# EAGLE board BaseModule (EAGLE 8.2.2)
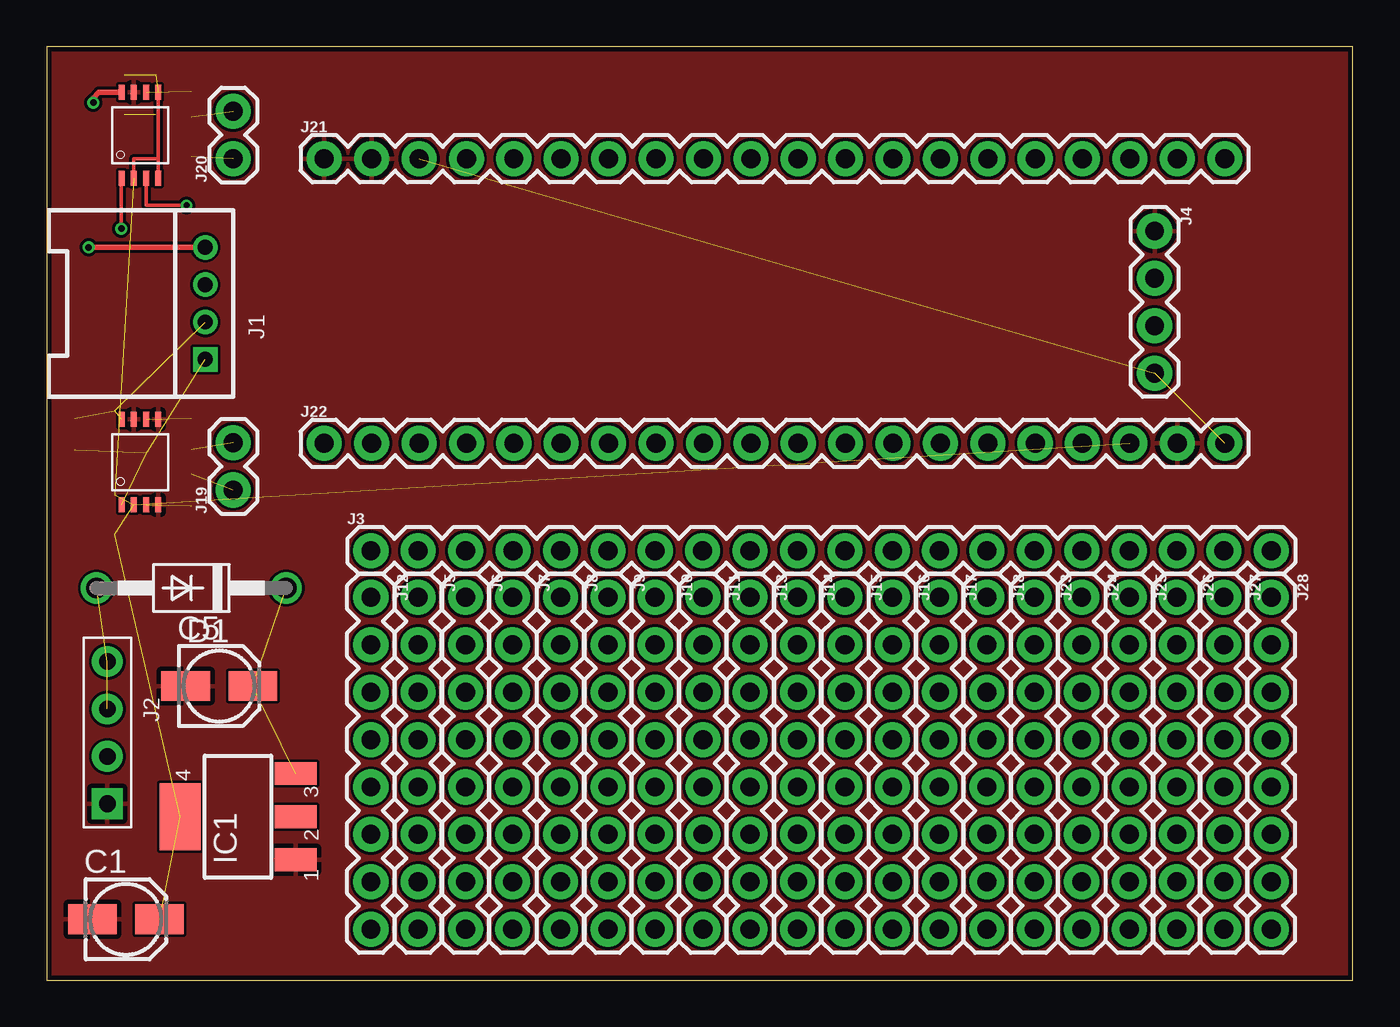
[diagram p0: board, top side]
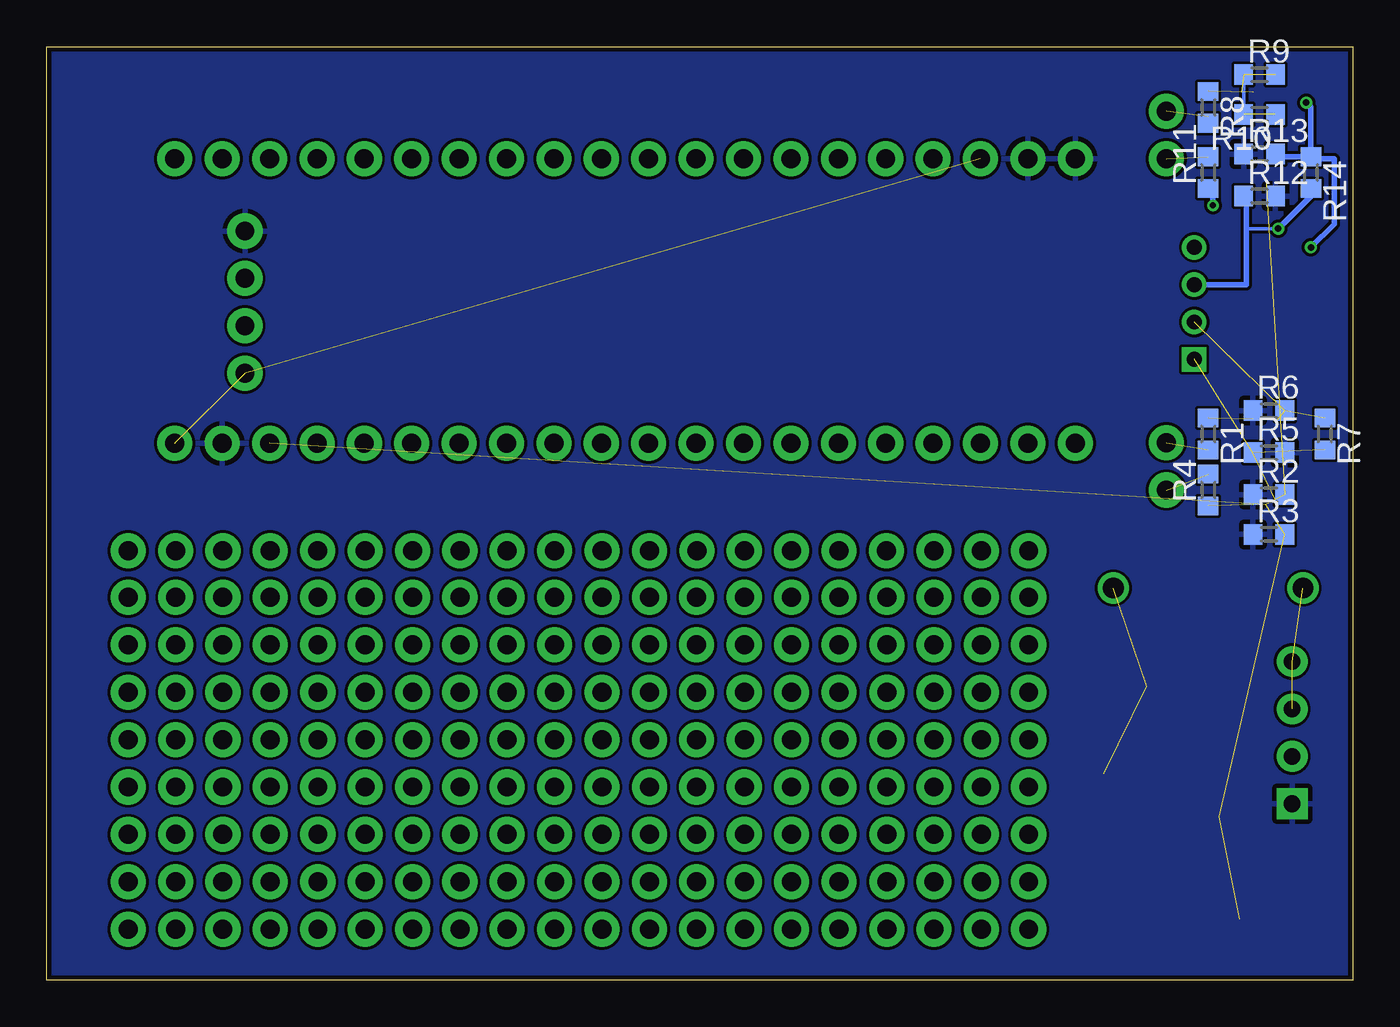
[diagram p1: board, bottom side, seen from below]

Size 70 x 50 mm. Coordinates in mm from the lower left corner, seen from the top.
Outline: 0,0 70,0 70,50 0,50 0,0
Copper layers (1*16): Top 0.035mm / dielectric 1.5mm / Bottom 0.035mm
Design rules "SeeedStudio_2layer_DRU_no_angle_20140221": minimum track width 6mil, minimum drill 12mil, track to track 6mil, track to pad 6mil, pad to pad 6mil, via to via 6mil, smd to smd 0mil, copper to edge 10mil, drill to drill 10mil, minimum pad ring 10mil, minimum via ring 6mil, stop-mask expansion 2mil, vias tented up to drill 100mil, thermal gap 10mil

## Footprints (pad centres in the part's own frame; a part is rotated, then mirrored left to right if it is on the bottom)
153CLV-0405 = smd 2.6 x 1.6: + 1.8,0; - -1.8,0
DO41-10 = drill 1.118: A 5.08,0; C -5.08,0
SOT223 = smd 1.219 x 2.235: 1 -2.311,-3.099; 2 0,-3.099; 3 2.311,-3.099 | smd 3.6 x 2.2: 4 0,3.099
HW4-2.0-90D = drill 0.8 pad 1.27 square: 1 -3,0 | drill 0.8 pad 1.27: 2 -1,0; 3 1,0; 4 3,0
H4-2.54 = drill 0.889 pad 1.651 square: 1 0,3.81 | drill 0.889 pad 1.651: 2 0,1.27; 3 0,-1.27; 4 0,-3.81
1X20 = drill 1.016 pad 1.88: 1 0,0; 2 2.54,0; 3 5.08,0; 4 7.62,0; 5 10.16,0; 6 12.7,0; 7 15.24,0; 8 17.78,0; 9 20.32,0; 10 22.86,0; 11 25.4,0; 12 27.94,0; 13 30.48,0; 14 33.02,0; 15 35.56,0; 16 38.1,0; 17 40.64,0; 18 43.18,0; 19 45.72,0; 20 48.26,0
1X04 = drill 1.016 pad 1.88: 1 0,0; 2 2.54,0; 3 5.08,0; 4 7.62,0
1X08 = drill 1.016 pad 1.88: 1 0,0; 2 2.54,0; 3 5.08,0; 4 7.62,0; 5 10.16,0; 6 12.7,0; 7 15.24,0; 8 17.78,0
1X02 = drill 1.016 pad 1.88: 1 0,0; 2 2.54,0
R0603 = smd 1 x 1.1: 1 -0.85,0; 2 0.85,0
MAX485 = smd 0.32 x 0.8: 1 -0.975,-2.3; 2 -0.325,-2.3; 3 0.325,-2.3; 4 0.975,-2.3; 5 0.975,2.3; 6 0.325,2.3; 7 -0.325,2.3; 8 -0.975,2.3

## Placement (x,y rotation side)
C1  20uF  [153CLV-0405]  4.25,3.25 0 top
C5  100uF  [153CLV-0405]  9.25,15.75 0 top
D1  1N4004  [DO41-10]  7.75,21 180 top
IC1  AMS1117-5.0  [SOT223]  10.25,8.75 90 top
J1  4P-2.0-90D  [HW4-2.0-90D]  8.5,36.25 90 top
J2  4p-2.54  [H4-2.54]  3.25,13.25 180 top
J3  [1X20]  17.38,23 0 top
J4  [1X04]  59.38,40.12 270 top
J5  [1X08]  19.91,20.5 270 top
J6  [1X08]  22.45,20.5 270 top
J7  [1X08]  24.98,20.5 270 top
J8  [1X08]  27.55,20.5 270 top
J9  [1X08]  30.07,20.5 270 top
J10  [1X08]  32.62,20.5 270 top
J11  [1X08]  35.16,20.5 270 top
J12  [1X08]  17.38,20.5 270 top
J13  [1X08]  37.7,20.5 270 top
J14  [1X08]  40.24,20.5 270 top
J15  [1X08]  42.77,20.5 270 top
J16  [1X08]  45.33,20.5 270 top
J17  [1X08]  47.85,20.5 270 top
J18  [1X08]  50.4,20.5 270 top
J19  [1X02]  10,26.25 90 top
J20  [1X02]  10,44 90 top
J21  [1X20]  14.88,44 0 top
J22  [1X20]  14.88,28.75 0 top
J23  [1X08]  52.94,20.5 270 top
J24  [1X08]  55.47,20.5 270 top
J25  [1X08]  58.02,20.5 270 top
J26  [1X08]  60.55,20.5 270 top
J27  [1X08]  63.08,20.5 270 top
J28  [1X08]  65.62,20.5 270 top
R1  10K  [R0603]  7.75,29.25 270 bottom
R2  10K  [R0603]  4.5,26 0 bottom
R3  10K  [R0603]  4.5,23.88 0 bottom
R4  10K  [R0603]  7.75,26.25 90 bottom
R5  20K  [R0603]  4.5,28.25 0 bottom
R6  20K  [R0603]  4.5,30.5 0 bottom
R7  120R  [R0603]  1.5,29.25 270 bottom
R8  10K  [R0603]  7.75,46.75 270 bottom
R9  10K  [R0603]  5,48.5 0 bottom
R10  10K  [R0603]  5,46.38 180 bottom
R11  10K  [R0603]  7.75,43.25 90 bottom
R12  20K  [R0603]  5,42 0 bottom
R13  20K  [R0603]  5,44.25 0 bottom
R14  120R  [R0603]  2.25,43.25 270 bottom
U$1  MAX485  [MAX485]  5,27.75 0 top
U$2  MAX485  [MAX485]  5,45.25 0 top

## Library data of the parts
C1 C5 R1-R14 = rcl
D1 = diode
IC1 = linear
J1 = Seeed-Connector
J2 = Seeed-Connector; MPN: P125-1104A0BS116A1
J3 J19-J22 = SparkFun-Connectors
J4 = SparkFun-Connectors; PROD_ID: CONN-09696
J5-J18 J23-J28 = SparkFun-Connectors; PROD_ID: CONN-08438
U$1 U$2 = Vaello

## Nets
+3V3: J4.4 J21.3 J22.20
+5V: C1.+ IC1.4 J22.18 R2.2 R3.2 R9.1 R9.2 R10.1 R10.2 U$1.2 U$2.2 U$2.4 U$2.5
+12V: D1.A J2.3 J2.4
A_IN: J1.2 R6.2 R7.1 U$1.8
A_OUT: J1.1 R5.1 R7.2 U$1.1
B_IN: J1.4 R13.2 R14.1 U$2.8
B_OUT: J1.3 R12.1 R14.2 U$2.1
GND: C1.- C5.- IC1.1 J2.1 J4.1 J21.1 J21.2 J22.19 R2.1 R3.1 R5.2 R6.1 R12.2 R13.1 U$1.4 U$1.5 U$1.7 U$2.7
N$1: R4.1 U$1.3
N$2: R11.1 U$2.3
N$3: R8.1 U$2.6
N$4: R1.1 U$1.6
N$9: C5.+ D1.C IC1.3
N$10: J21.9
N$11: J21.10
N$12: J21.11
N$13: J21.12
N$14: J21.13
N$15: J21.14
N$16: J21.15
N$17: J21.16
N$18: J21.17
N$19: J21.18
N$20: J21.19
N$21: J21.20
PB_0: J21.8
PB_1: J21.7
PB_10: J21.6
PB_11: J21.5
RX1: J19.1 R4.2
RX2: J20.1 R11.2
SWDCLK: J4.2
SWDIO: J4.3
TX1: J19.2 R1.2
TX2: J20.2 R8.2

## Tracks (layer width: path | path; a pad name or v marks a point on that pad's centre or on a via)
+3V3  (2 unrouted)
+5V  (9 unrouted)
  Top 0.2: U$2.4 5.97,44 | U$2.2 4.67,44 5.97,44 | 5.97,44 U$2.5
  Bottom 0.2: R10.2 R9.1
+12V  (2 unrouted)
A_IN  (3 unrouted)
A_OUT  (3 unrouted)
B_IN  (via drill 0.35)
  Top 0.3: J1.4 v2.25,39.25 | U$2.8 2.8,47.55 2.5,47.25 v2.5,47
  Bottom 0.3: R14.1 4,44.1 R13.2 | R14.1 2.25,44 1,44 1,40.5 v2.25,39.25 | v2.5,47 2.25,46.75 R14.1
B_OUT  (via drill 0.35)
  Top 0.2: U$2.1 4,42.95 v4,40.25
  Bottom 0.2: 5.7,42.4 5.7,40.25 v4,40.25
  Bottom 0.3: R12.1 5.7,42.4 5.7,37.25 J1.3 | R14.2 2.25,42 v4,40.25
GND
  pour Top: -2,52 82,52 82,-2 -2,-2
  pour Bottom: -6.5,52 84.5,52 84.5,-1.12 -6.5,-1.5
N$1  (1 unrouted)
N$2  (via drill 0.32)
  Top 0.2: U$2.3 5.33,41.5 v7.5,41.5
  Bottom 0.3: R11.1 7.5,42.15 v7.5,41.5
N$3  (1 unrouted)
N$4  (1 unrouted)
N$9  (2 unrouted)
RX1  (1 unrouted)
RX2  (1 unrouted)
TX1  (1 unrouted)
TX2  (1 unrouted)
  Bottom 0.3: R8.2 7.75,46.25

## Text on the board
silktop: BaseBoard